# Altium PCB DE-110817.PcbDoc (part 1 of 2)
Units mil, origin at the board's own origin, x right, y up, seen from the top; angles counter-clockwise.
Board outline 3742.01 x 2935 mil, 2 copper layers (Top Layer, Bottom Layer); 204 components, 127 nets, 615 pads, 148 vias.
Unrouted connection lines stored in the file: 4.
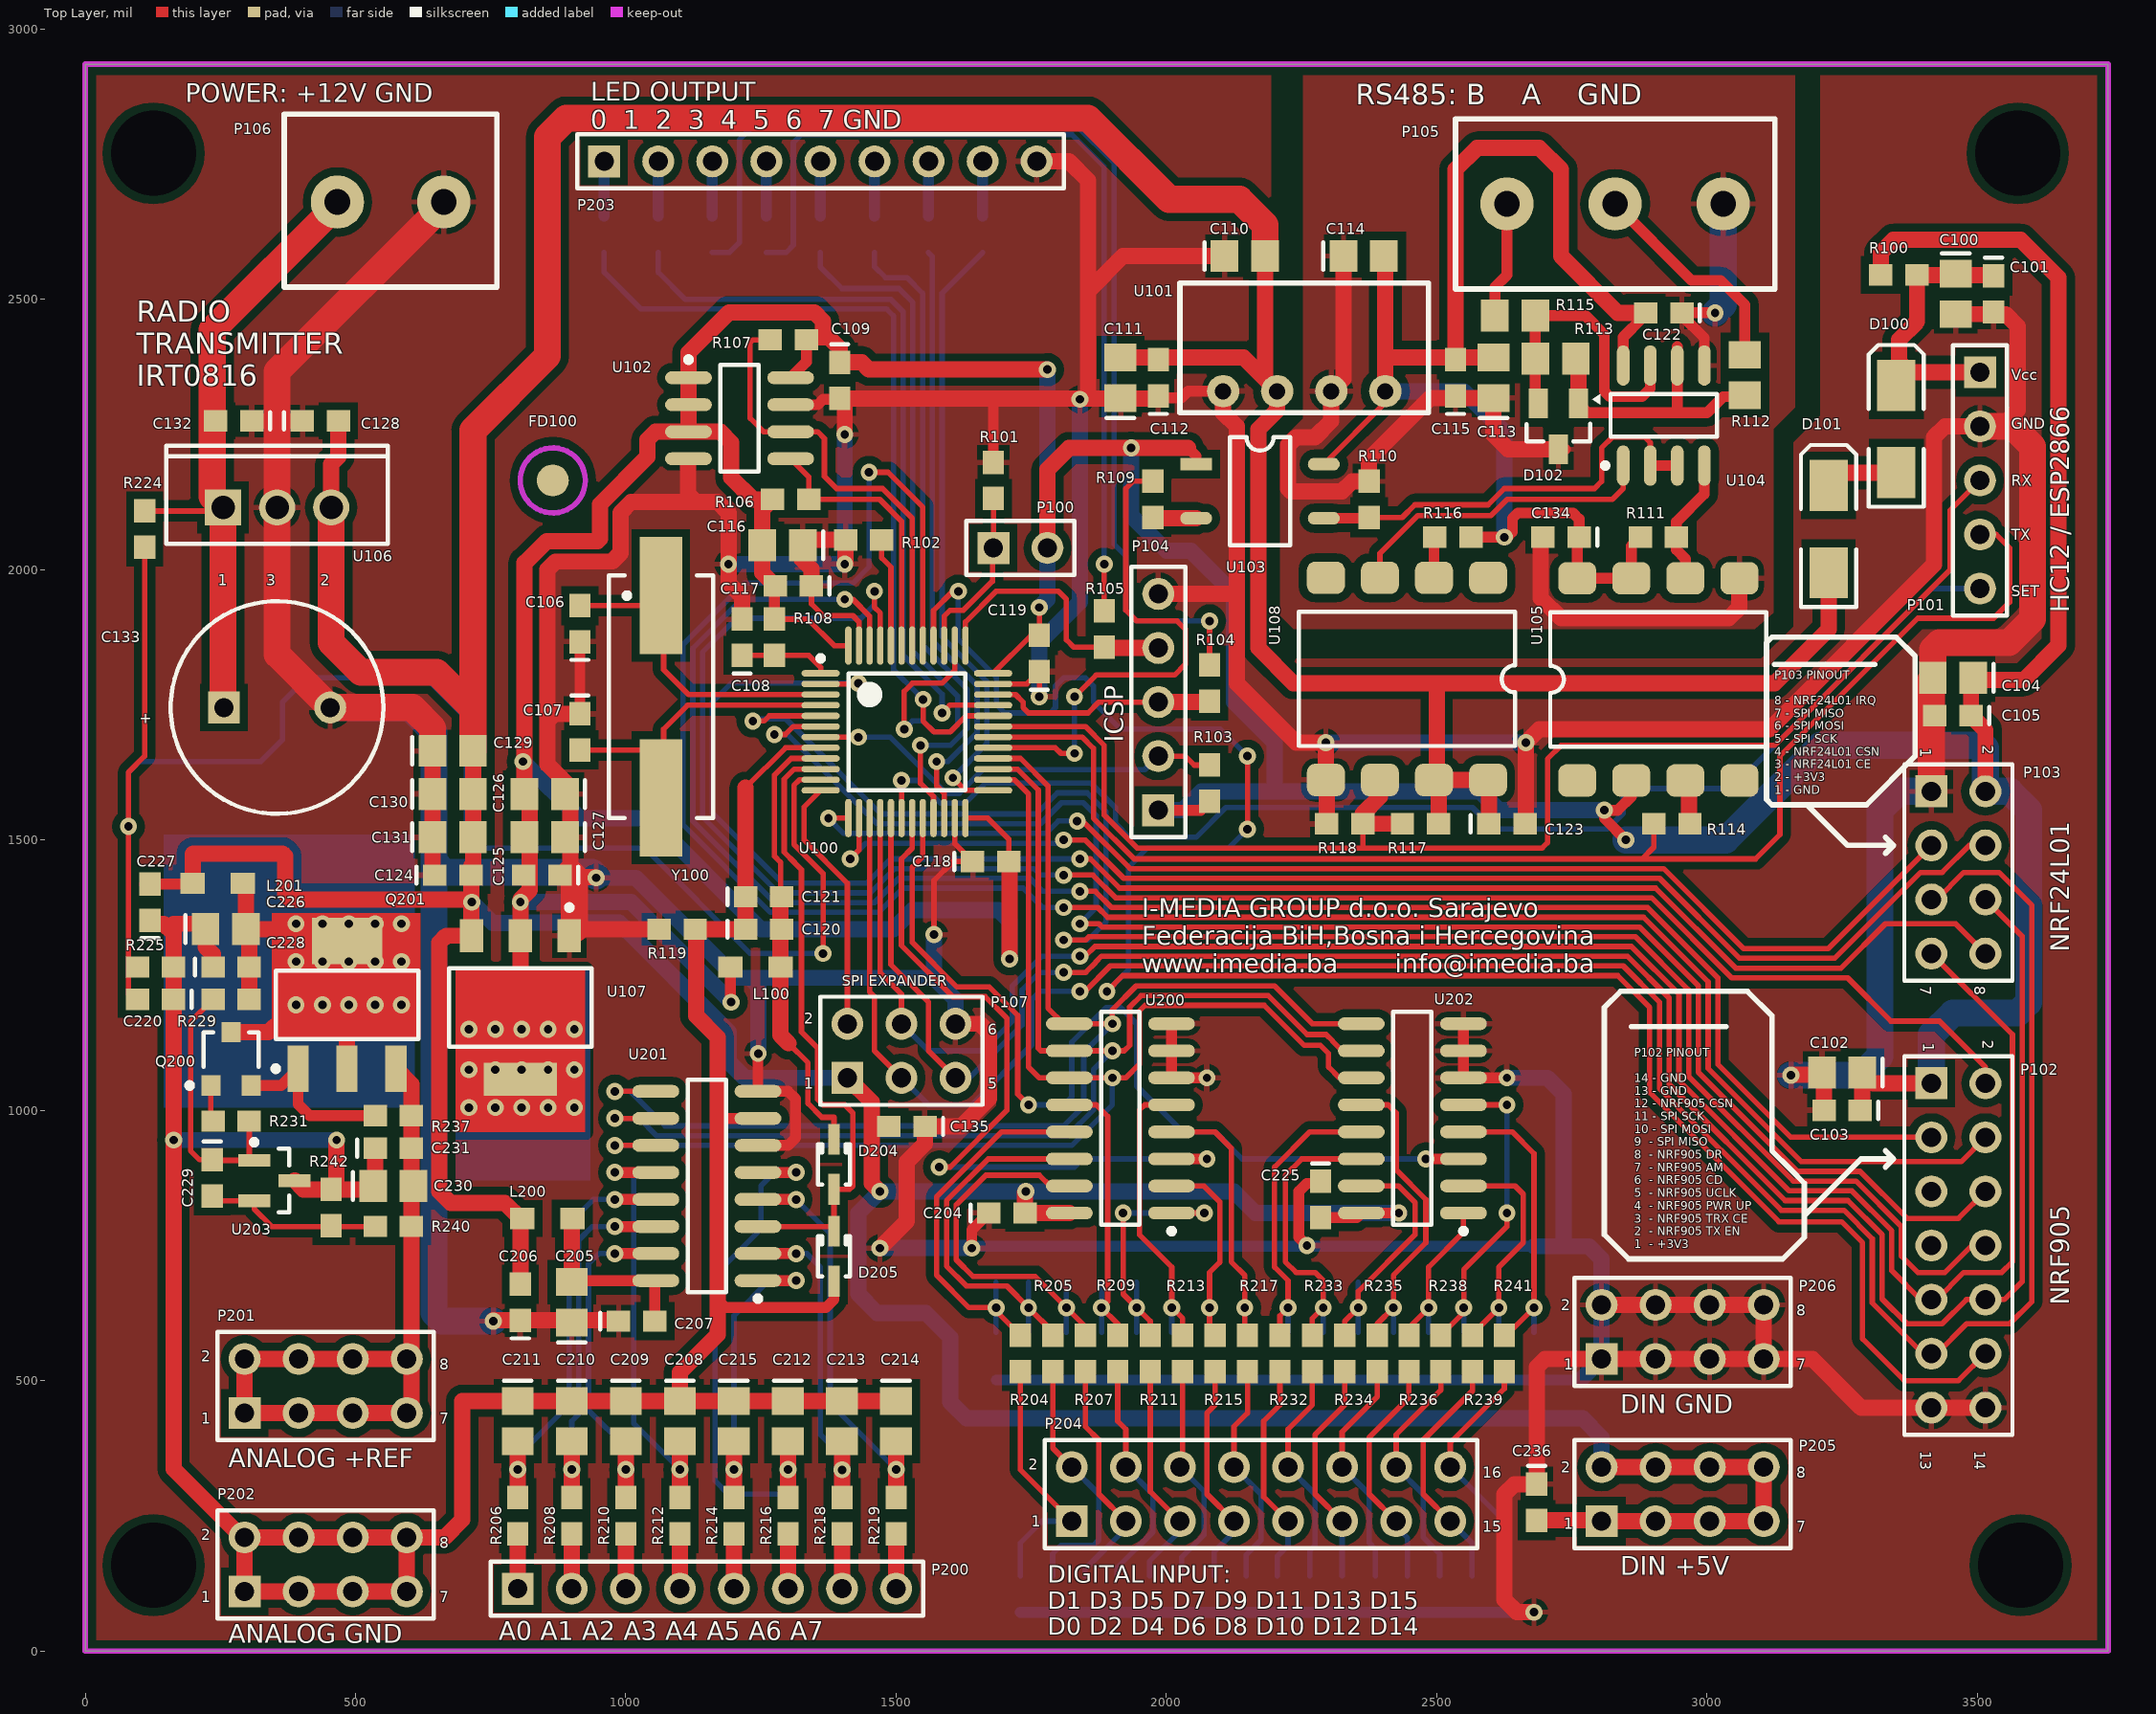
[diagram p0: Top Layer view]
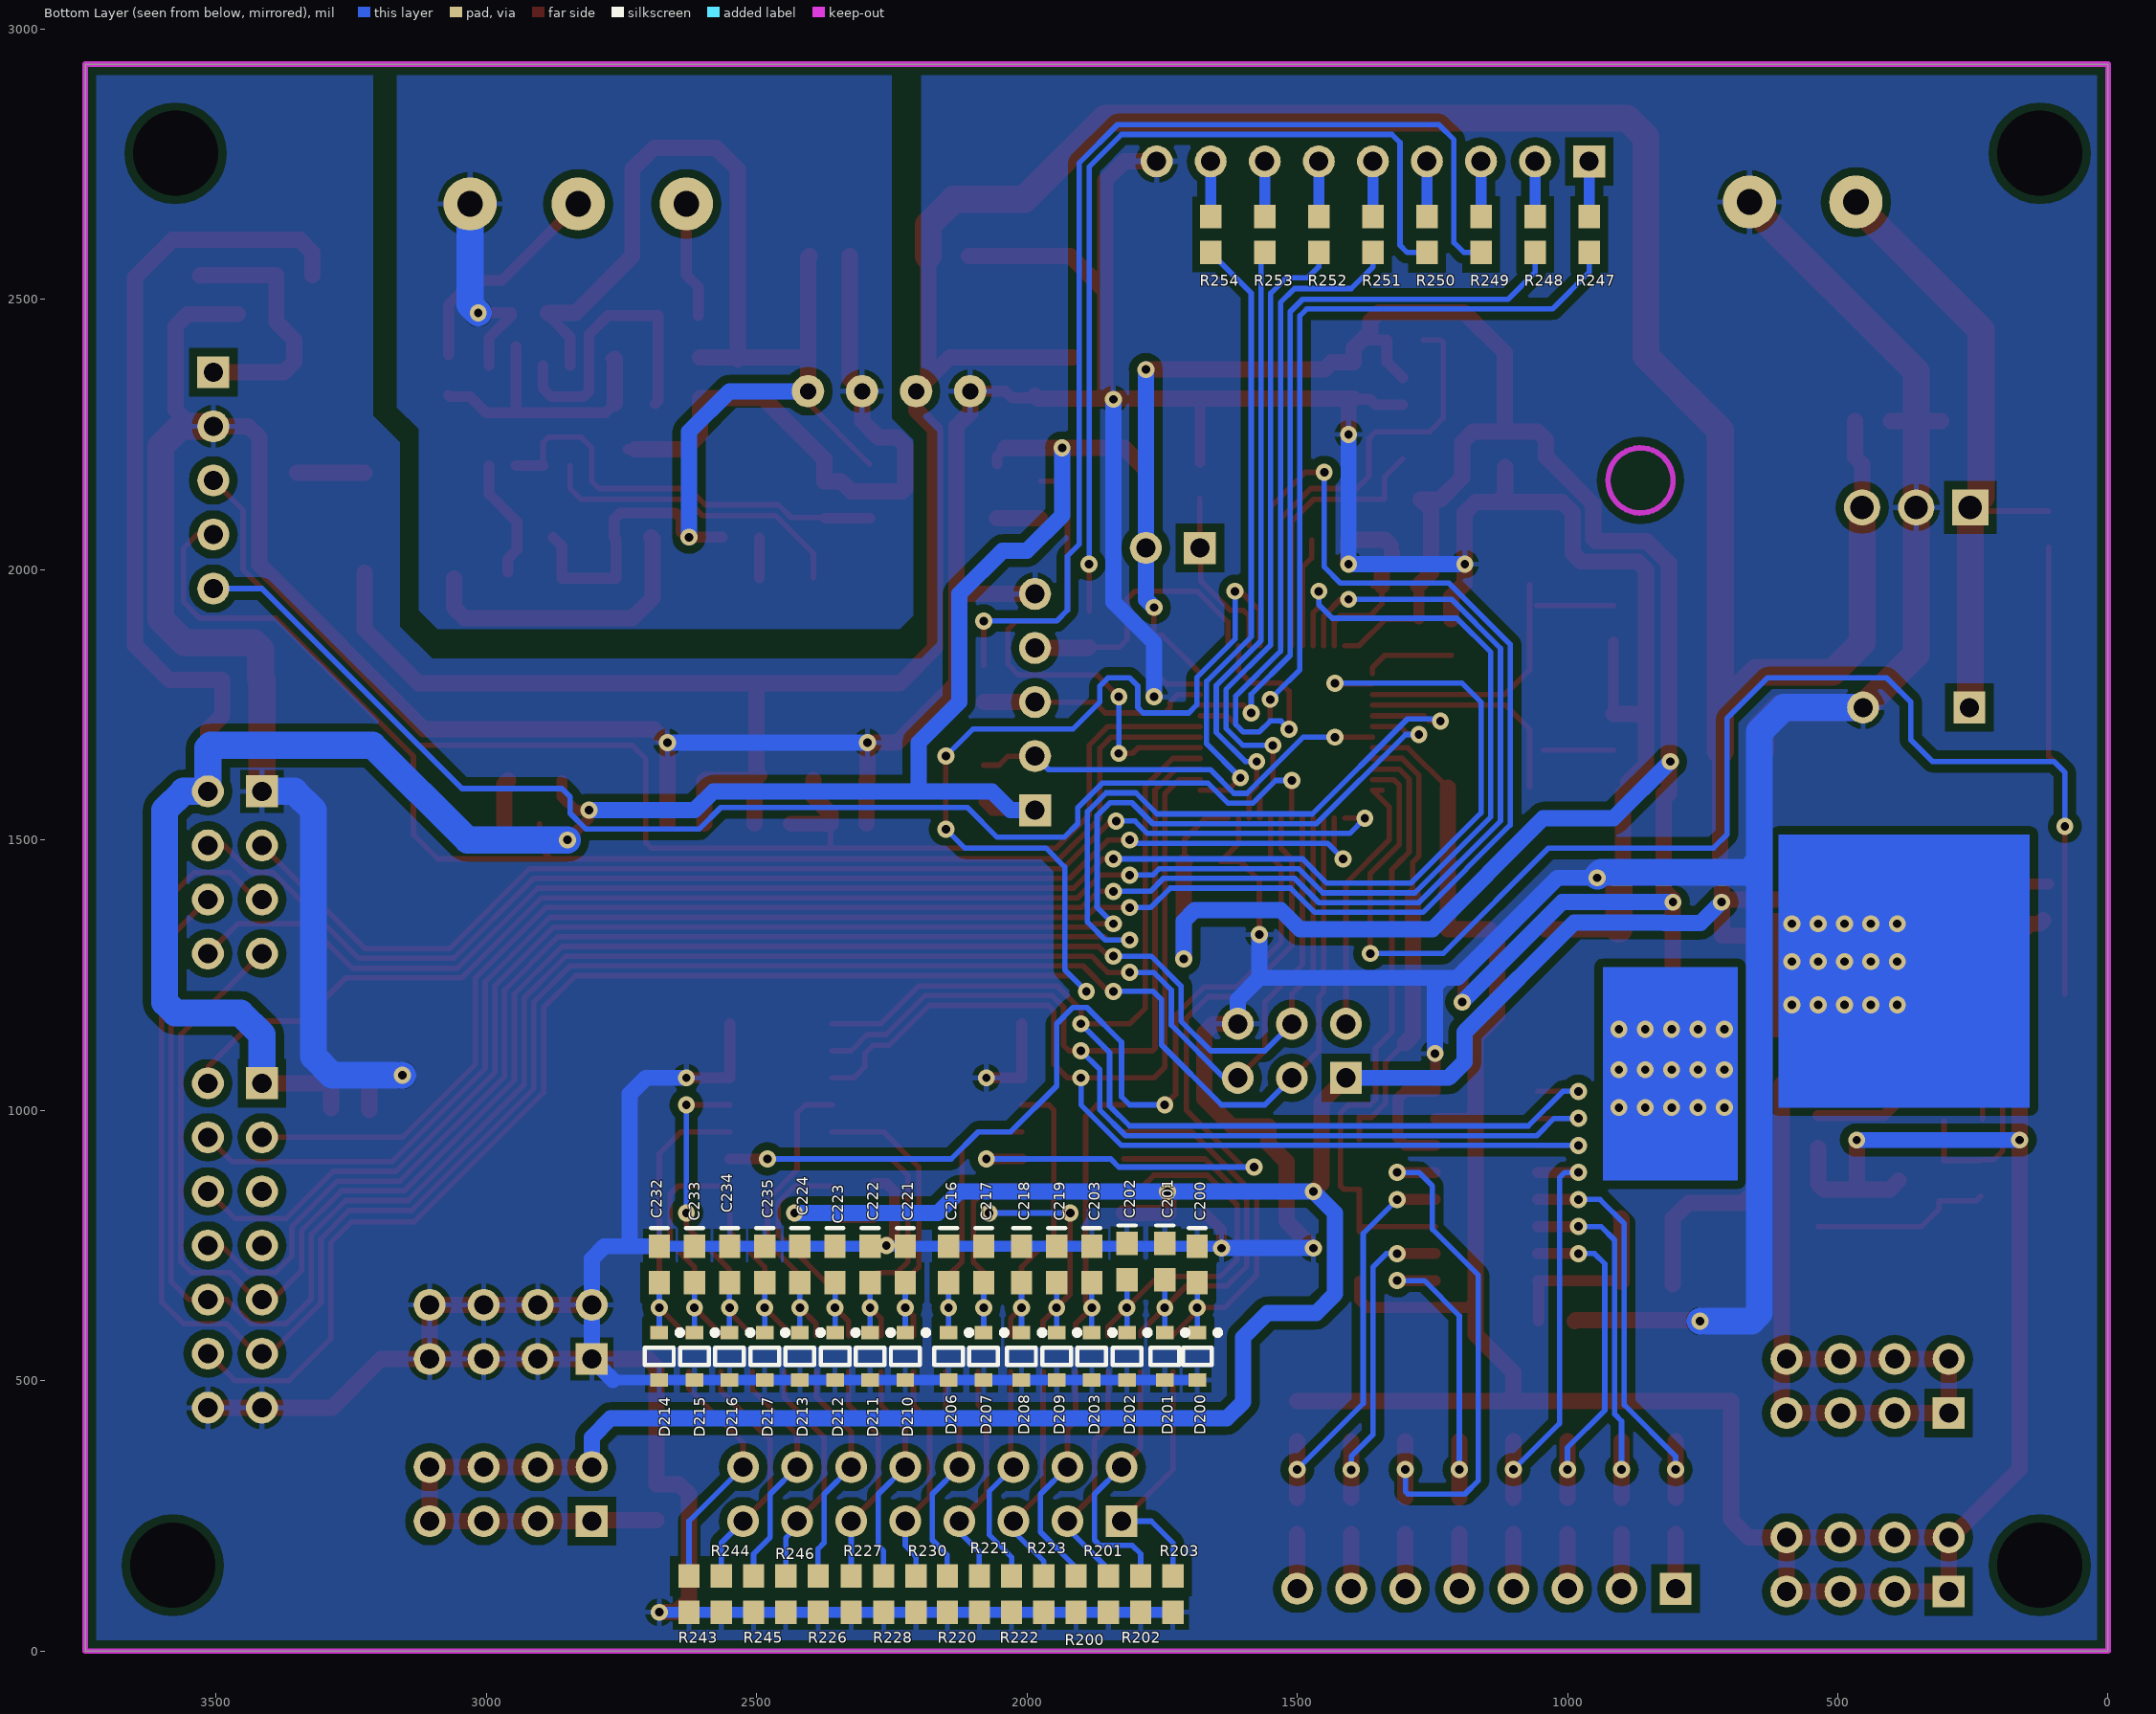
[diagram p1: Bottom Layer view, seen from below]

## Layer stack, top to bottom
Top Solder: solder mask 0.4, Solder Resist, Dk 3.5
Top Layer: signal copper 1.4
Dielectric 1: dielectric 12.6, FR-4, Dk 4.8
Bottom Layer: signal copper 1.4
Bottom Solder: solder mask 0.4, Solder Resist, Dk 3.5

## Board outline
0,0 0,2935 3742.01,2935 3742.01,0

## Design rules (kind name [scope] priority, off if disabled: settings)
Clearance [All] p1: gap=8 except(5: Arc-SMDPad Track-SMDPad SMDPad-SMDPad; 15: Arc-Poly Track-Poly SMDPad-Poly THPad-Poly Via-Poly Fill-Poly Poly-Poly)
PolygonConnect [All] p1: connectstyle=Relief reliefconductorwidth=10 reliefentries=4 polygonreliefangle="90 Angle" airgapwidth=10
RoutingVias [All] p1: holewidth=28 width=50 viastyle="Through Hole" minholewidth=28 minwidth=50 maxholewidth=28 maxwidth=50
SolderMaskExpansion [All] p1: expansion=4
Width [All] p1: maxlimit=500 minlimit=10 preferedwidth=30
30 further rules are at their usual default settings.

## Classes and differential pairs
component class DE-110817_02: C200 C201 C202 C203 C204 C205 C206 C207 C208 C209 C210 C211 C212 C213 C214 C215 C216 C217 C218 C219 C220 C221 C222 C223 C224 C225 C226 C227 C228 C229 C230 C231 C232 C233 C234 C235 C236 D200 D201 D202 D203 D204 D205 D206 D207 D208 D209 D210 D211 D212 D213 D214 D215 D216 D217 L200 L201 P13 P200 P201 P202 P203 P204 P205 P206 Q200 Q201 R74 R200 R201 R202 R203 R204 R205 R206 R207 R208 R209 R210 R211 R212 R213 R214 R215 R216 R217 R218 R219 R220 R221 R222 R223 R224 R225 R226 R227 R228 R229 R230 R231 R232 R233 R234 R235 R236 R237 R238 R239 R240 R241 R242 R243 R244 R245 R246 R247 R248 R249 R250 R251 R252 R253 R254 U200 U201 U202 U203
component class DE-110817_01: C100 C101 C102 C103 C104 C105 C106 C107 C108 C109 C110 C111 C112 C113 C114 C115 C116 C117 C118 C119 C120 C121 C122 C123 C124 C125 C126 C127 C128 C129 C130 C131 C132 C133 C134 C135 D100 D101 D102 FD100 L100 P100 P101 P102 P103 P104 P105 P106 P107 R100 R101 R102 R103 R104 R105 R106 R107 R108 R109 R110 R111 R112 R113 R114 R115 R116 R117 R118 R119 U100 U101 U102 U103 U104 U105 U106 U107 U108 Y100

## Components (designator, comment, footprint, x,y, rotation, side; value= is the part's Value field where it differs from the comment)
C100 "10uF" 0805 3460,2510 r270 top
C101 "100nF" 0603 3530,2510 r270 top
C102 "10uF" 0805 3250,1070 r180 top
C103 "100nF" 0603 3250,1000 r180 top
C104 "10uF" 0805 3455,1800 r180 top
C105 "100nF" 0603 3455,1730 r180 top
C106 "22pF" 0603 915,1900 r90 top
C107 "22pF" 0603 915,1700 r270 top
C108 "100nF" 0603 1215,1875 r90 top
C109 "100nF" 0603 1395.51,2350 r270 top
C110 "10uF" 0805 2145,2580 r0 top
C111 "10uF" 0805 1915,2355 r90 top
C112 "100nF" 0603 1985,2355 r90 top
C113 "10uF" 0805 2605,2355 r90 top
C114 "10uF" 0805 2365,2580 r0 top
C115 "100nF" 0603 2535,2355 r90 top
C116 "10uF" 0805 1290,2045 r180 top
C117 "100nF" 0603 1310,1970 r180 top
C118 "100nF" 0603 1675,1460 r0 top
C119 "100nF" 0603 1765,1845 r90 top
C120 "1uF" 0603 1255,1335 r0 top
C121 "100nF" 0603 1255,1395 r0 top
C122 "100nF" 0603 2920,2475 r180 top
C123 "100nF" 0603 2630,1530 r0 top
C124 "100nF" 0603 680,1435 r0 top
C125 "100nF" 0603 845,1435 r180 top
C126 "10uF" 0805 850,1585 r180 top
C127 "10uF" 0805 850,1505 r180 top
C128 "100nF" 0603 435,2275 r0 top
C129 "10uF" 0805 680,1665 r0 top
C130 "10uF" 0805 680,1585 r0 top
C131 "10uF" 0805 680,1505 r0 top
C132 "100nF" 0603 275,2275 r180 top
C133 "1000uF" CAPPR5-10x16 355,1745 r0 top
C134 "100nF" 0603 2730,2060 r180 top
C135 "100nF" 0603 1520,970 r180 top
C200 "100nF" 0603 1685,715 r270 bottom
C201 "100nF" 0603 1745,720 r270 bottom
C202 "100nF" 0603 1815,720 r270 bottom
C203 "100nF" 0603 1880,715 r270 bottom
C204 "100nF" 0603 1705,810 r0 top
C205 "10uF" 0805 900,645 r90 top
C206 "100nF" 0603 805,645 r90 top
C207 "100nF" 0603 1020,610 r0 top
C208 "10uF" 0805 1100,425 r270 top
C209 "10uF" 0805 1000,425 r270 top
C210 "10uF" 0805 900,425 r270 top
C211 "10uF" 0805 800,425 r270 top
C212 "10uF" 0805 1300,425 r270 top
C213 "10uF" 0805 1400,425 r270 top
C214 "10uF" 0805 1500,425 r270 top
C215 "10uF" 0805 1200,425 r270 top
C216 "100nF" 0603 2145,715 r270 bottom
C217 "100nF" 0603 2080,715 r270 bottom
C218 "100nF" 0603 2010,715 r270 bottom
C219 "100nF" 0603 1945,715 r270 bottom
C220 "100nF" 0603 130,1205 r180 top
C221 "100nF" 0603 2225,715 r270 bottom
C222 "100nF" 0603 2290,715 r270 bottom
C223 "100nF" 0603 2355,715 r270 bottom
C224 "100nF" 0603 2420,715 r270 bottom
C225 "100nF" 0603 2285,835 r270 top
C226 "10uF" 0805 260,1335 r0 top
C227 "100nF" 0603 120,1385 r90 top
C228 "100nF" 0603 270,1265 r0 top
C229 "10nF" 0603 235,875 r270 top
C230 "10uF" 0805 570,860 r0 top
C231 "100nF" 0603 570,930 r0 top
C232 "100nF" 0603 2680,715 r270 bottom
C233 "100nF" 0603 2615,715 r270 bottom
C234 "100nF" 0603 2550,715 r270 bottom
C235 "100nF" 0603 2485,715 r270 bottom
C236 "100nF" 0603 2685,275 r270 top
D100 "1N4001" SMA 3350,2260 r90 top
D101 "1N4001" SMA 3225,2075 r90 top
D102 "SM712" SOT23_3L 2725,2265 r270 top
D200 "3V3" ONSC-SOD-323-2-477-02_V 1685,545 r270 bottom
D201 "3V3" ONSC-SOD-323-2-477-02_V 1745,545 r270 bottom
D202 "3V3" ONSC-SOD-323-2-477-02_V 1815,545 r270 bottom
D203 "3V3" ONSC-SOD-323-2-477-02_V 1880,545 r270 bottom
D204 "1N4148" SOD323 1385,900 r90 top
D205 "1N4148" SOD323 1385,730 r90 top
D206 "3V3" ONSC-SOD-323-2-477-02_V 2145,545 r270 bottom
D207 "3V3" ONSC-SOD-323-2-477-02_V 2080,545 r270 bottom
D208 "3V3" ONSC-SOD-323-2-477-02_V 2010,545 r270 bottom
D209 "3V3" ONSC-SOD-323-2-477-02_V 1945,545 r270 bottom
D210 "3V3" ONSC-SOD-323-2-477-02_V 2225,545 r270 bottom
D211 "3V3" ONSC-SOD-323-2-477-02_V 2290,545 r270 bottom
D212 "3V3" ONSC-SOD-323-2-477-02_V 2355,545 r270 bottom
D213 "3V3" ONSC-SOD-323-2-477-02_V 2420,545 r270 bottom
D214 "3V3" ONSC-SOD-323-2-477-02_V 2680,545 r270 bottom
D215 "3V3" ONSC-SOD-323-2-477-02_V 2615,545 r270 bottom
D216 "3V3" ONSC-SOD-323-2-477-02_V 2550,545 r270 bottom
D217 "3V3" ONSC-SOD-323-2-477-02_V 2485,545 r270 bottom
FD100 "Fiducial" Fiducial 865,2165 r0 top
L100 "120R" SMD-0805 1240,1265 r0 top
L200 "120R" SMD-0805 855,800 r0 top
L201 "120R" SMD-0805 245,1420 r0 top
P100 "CONFIG" HDR1X2 1680,2040 r0 top
P101 "HC12_RADIO" HDR1X5 3505,2365 r270 top
P102 "nRF905" HDR2X7 3415,1050 r270 top
P103 "NRF24L01" HDR2X4 3415,1590 r270 top
P104 "ULINK_ICSP" HDR1X5 1985,1555 r90 top
P105 "TERMINAL BLOK 3" "TERMINAL BLOK 3" 2830,2676.46 r270 top
P106 "TERMINAL BLOK 2" "TERMINAL BLOK 2" 565,2680 r90 top
P107 "SPI_EXPANDER" HDR2X3 1410,1060 r0 top
P200 "ANALOG_INPUT" HDR1X8 800,115 r0 top
P201 "ANIN_VREF" HDR2X4 295,440 r0 top
P202 "ANIN_VSS" HDR2X4 295,110 r0 top
P203 "LED" HDR1X9 960,2755 r0 top
P204 "DIGITAL_INPUT" HDR2X8 1825,240 r0 top
P205 "DIN_VDD" HDR2X4 2805,240 r0 top
P206 "DIN_VSS" HDR2X4 2805,540 r0 top
Q200 "MMBT2222" 318-08 270,1095 r0 top
Q201 "BCP56" SOT223_N 484.33,1195 r90 top
R100 "NF" ERA-0603 3355,2545 r180 top
R101 "100K" ERA-0603 1680,2165 r270 top
R102 "10K" ERA-0603 1440,2055 r180 top
R103 "10K" ERA-0603 2080,1605 r270 top
R104 "100R" ERA-0603 2080,1790 r90 top
R105 "100R" ERA-0603 1885,1890 r90 top
R106 "2K2" ERA-0603 1305,2130 r0 top
R107 "2K2" ERA-0603 1300.51,2425 r180 top
R108 "0R" ERA-0603 1275,1875 r90 top
R109 "330R" ERA-0603 1975,2130 r90 top
R110 "470R" ERA-0603 2375,2130 r90 top
R111 "470R" ERA-0603 2910,2060 r0 top
R112 "10R" ERA-0805 3070,2360 r90 top
R113 "120R" ERA-0805 2720,2390 r0 top
R114 "330R" ERA-0603 2935,1530 r0 top
R115 "10R" ERA-0805 2645,2470 r180 top
R116 "330R" ERA-0603 2530,2060 r0 top
R117 "510R" ERA-0603 2470,1530 r180 top
R118 "1K" ERA-0603 2330,1530 r0 top
R119 "0R" ERA-0603 1095,1335 r0 top
R200 "10K" ERA-0603 1909,105 r90 bottom
R201 "10K" ERA-0603 1849.33,105 r90 bottom
R202 "10K" ERA-0603 1789.67,105 r90 bottom
R203 "10K" ERA-0603 1730,105 r90 bottom
R204 "10K" ERA-0603 1730,550 r90 top
R205 "10K" ERA-0603 1790,550 r90 top
R206 "100R" ERA-0603 800,250 r270 top
R207 "10K" ERA-0603 1850,550 r90 top
R208 "100R" ERA-0603 900,250 r270 top
R209 "10K" ERA-0603 1910,550 r90 top
R210 "100R" ERA-0603 1000,250 r270 top
R211 "10K" ERA-0603 1970,550 r90 top
R212 "100R" ERA-0603 1100,250 r270 top
R213 "10K" ERA-0603 2030,550 r90 top
R214 "100R" ERA-0603 1200,250 r270 top
R215 "10K" ERA-0603 2090,550 r90 top
R216 "100R" ERA-0603 1300,250 r270 top
R217 "10K" ERA-0603 2150,550 r90 top
R218 "100R" ERA-0603 1400,250 r270 top
R219 "100R" ERA-0603 1500,250 r270 top
R220 "10K" ERA-0603 2147.33,105 r90 bottom
R221 "10K" ERA-0603 2088,105 r90 bottom
R222 "10K" ERA-0603 2028.33,105 r90 bottom
R223 "10K" ERA-0603 1968.67,105 r90 bottom
R224 "330K" ERA-0603 110,2075 r90 top
R225 "82K" ERA-0603 130,1265 r180 top
R226 "10K" ERA-0603 2386.33,105 r90 bottom
R227 "10K" ERA-0603 2325,105 r90 bottom
R228 "10K" ERA-0603 2265,105 r90 bottom
R229 "560R" ERA-0603 270,1205 r0 top
R230 "10K" ERA-0603 2205,105 r90 bottom
R231 "33R" ERA-0603 270,980 r0 top
R232 "10K" ERA-0603 2210,550 r90 top
R233 "10K" ERA-0603 2270,550 r90 top
R234 "10K" ERA-0603 2330,550 r90 top
R235 "10K" ERA-0603 2390,550 r90 top
R236 "10K" ERA-0603 2448.75,550 r90 top
R237 "4K7" ERA-0603 570,990 r0 top
R238 "10K" ERA-0603 2507.5,550 r90 top
R239 "10K" ERA-0603 2566.25,550 r90 top
R240 "1K8" ERA-0603 570,785 r0 top
R241 "10K" ERA-0603 2625,550 r90 top
R242 "5K6" ERA-0603 455,820 r90 top
R243 "10K" ERA-0603 2625,105 r90 bottom
R244 "10K" ERA-0603 2565.33,105 r90 bottom
R245 "10K" ERA-0603 2505.67,105 r90 bottom
R246 "10K" ERA-0603 2446,105 r90 bottom
R247 "330R" ERA-0603 960,2620 r270 bottom
R248 "330R" ERA-0603 1060,2620 r270 bottom
R249 "220R" ERA-0603 1160,2620 r270 bottom
R250 "220R" ERA-0603 1260,2620 r270 bottom
R251 "330R" ERA-0603 1360,2620 r270 bottom
R252 "330R" ERA-0603 1460,2620 r270 bottom
R253 "330R" ERA-0603 1560,2620 r270 bottom
R254 "330R" ERA-0603 1660,2620 r270 bottom
U100 "STM32F103C8T6" STM-LQFP48_N 1520,1700 r0 top
U101 "B0505S/D-1W" B0505S-1W 2105,2330 r0 top
U102 "AT24C1024" SOIC-SN8_N 1210.51,2280 r0 top
U103 "PS2501L" SOP4 2055,2195 r0 top
U104 "SN75176BD" D008_L 2920,2285 r90 top
U105 "6N137" SMD-8 2760,1610 r90 top
U106 "L7805CV" TO220ABN 355,2115 r0 top
U107 "REG1117-3.3" ZZ311 805,1190 r180 top
U108 "6N137" SMD-8 2595,1985 r270 top
U200 "HCF4051M013TR" M16A_N 1915,985 r180 top
U201 "HCF4051M013TR" M16A_N 1150,860 r180 top
U202 "HCF4051M013TR" M16A_N 2455,985 r180 top
U203 "TL431CL3T" SOT23-3_N 350,870 r0 top
Y100 "8MHz" HC49/4H_SMX 1065,1765 r270 top

## Footprints (in the part's own frame and the unit in brackets; to place one, negate y for a bottom-side part, rotate by r counter-clockwise, add the part's x,y. Pads: shape width x height; smd on the part's side, far side on the other; paste and mask are expansions set on the pad)
318-08 [mm] "SOT-23; 3 Leads; Body 3.0 x 2.6 mm, inc. leads (LxW max)"
  rect 0.9x0.95 smd: 1(-0.95,-1.25) 2(0.95,-1.25) 3(0,1.25)
  silkscreen extent -2.07,-1.37 1.3,1.25
0603 [mm] "Chip Capacitor; Body 1.6 x 0.8 mm (LxW typ)"
  rect 1.1x1 smd: 1(-0.85,0) 2(0.85,0)
  silkscreen extent -1.7,-0.4 -1.7,0.4
0805 [mm] "Chip Capacitor; Body 2.0 x 1.2 mm (LxW typ)"
  rect 1.3x1.5 smd: 1(-0.95,0) 2(0.95,0)
  silkscreen extent -1.9,-0.65 -1.9,0.65
B0505S-1W [mil] "Isolated DC DC converter"
  round 60 hole 30: 1(0,0) 2(100,0) 3(200,0) 4(300,0)
  silkscreen extent -80,-40 380,200, body extent -80,-40 380,200, height 394
CAPPR5-10x16 [mm] "Capacitor, Electrolytic, Radial; Body 10 x 16 mm (Dia.xH typ); Pin Spacing 5 mm (typ)"
  rect 1.5x1.5 hole 0.9: 1(-2.5,0)
  round 1.5 hole 0.9: 2(2.5,0)
  silkscreen extent -5,-5 5,5, body extent -5,-5 5,5, height 18
D008_L [mm] "SOIC, 8-Leads, Body 4.9x3.9mm, Pitch 1.27mm, IPC High Density"
  oval 1.9x0.6 smd: 1(-2.35,1.905) 2(-2.35,0.635) 3(-2.35,-0.635) 4(-2.35,-1.905) 5(2.35,-1.905) 6(2.35,-0.635) 7(2.35,0.635) 8(2.35,1.905)
  silkscreen extent -2.47,-2.5 1,2.88, body extent -2,-2.5 2,2.5, height 1.75
ERA-0603 [mm] "Chip Resistor; Body 1.6 x 0.8 mm (LxW typ)"
  rect 1.1x1 smd: 1(-0.85,0) 2(0.85,0)
ERA-0805 [mm] "Chip Resistor; Body 2 x 1.3 mm (LxW typ)"
  rect 1.3x1.5 smd: 1(-0.95,0) 2(0.95,0)
Fiducial [mm] "Pick and place machine mark"
  round 1.5 smd paste+0 mask+0.8: FD(0,0)
  Keep-Out Layer circle w0.254: c0,0 r1.529
HC49/4H_SMX [mm] "Surface Mount Quartz Crystal; Body 13.4 (inc. leads) x 4.9 mm (LxW max)"
  rect 5.5x2 smd: 1(-4.75,0) 2(4.75,0)
  silkscreen extent -5.7,-2.45 5.7,2.45, body extent -7.6,-2.55 7.6,2.55, height 4.3
HDR1X2 [mm] "Connector; Header; 2 Position"
  rect 1.5x1.5 hole 0.9: 1(0,0)
  round 1.5 hole 0.9: 2(2.54,0)
  silkscreen extent -1.27,-1.27 3.81,1.27
HDR1X5 [mm] "Connector; Header; 5 Position"
  rect 1.5x1.5 hole 0.9: 1(0,0)
  round 1.5 hole 0.9: 2(2.54,0) 3(5.08,0) 4(7.62,0) 5(10.16,0)
  silkscreen extent -1.27,-1.27 11.43,1.27
HDR1X8 [mm] "Connector; Header; 8 Position"
  rect 1.5x1.5 hole 0.9: 1(0,0)
  round 1.5 hole 0.9: 2(2.54,0) 3(5.08,0) 4(7.62,0) 5(10.16,0) 6(12.7,0) 7(15.24,0) 8(17.78,0)
  silkscreen extent -1.27,-1.27 19.05,1.27
HDR1X9 [mm] "Connector; Header; 9 Position"
  rect 1.5x1.5 hole 0.9: 1(0,0)
  round 1.5 hole 0.9: 2(2.54,0) 3(5.08,0) 4(7.62,0) 5(10.16,0) 6(12.7,0) 7(15.24,0) 8(17.78,0) 9(20.32,0)
  silkscreen extent -1.27,-1.27 21.59,1.27
HDR2X3 [mm] "Connector; Header; 3x2 Position"
  rect 1.5x1.5 hole 0.9: 1(0,0)
  round 1.5 hole 0.9: 2(0,2.54) 3(2.54,0) 4(2.54,2.54) 5(5.08,0) 6(5.08,2.54)
  silkscreen extent -1.27,-1.27 6.35,3.81
HDR2X4 [mm] "Connector; Header; 4x2 Position"
  rect 1.5x1.5 hole 0.9: 1(0,0)
  round 1.5 hole 0.9: 2(0,2.54) 3(2.54,0) 4(2.54,2.54) 5(5.08,0) 6(5.08,2.54) 7(7.62,0) 8(7.62,2.54)
  silkscreen extent -1.27,-1.27 8.89,3.81
HDR2X7 [mm] "Connector; Header; 7x2 Position"
  rect 1.5x1.5 hole 0.9: 1(0,0)
  round 1.5 hole 0.9: 2(0,2.54) 3(2.54,0) 4(2.54,2.54) 5(5.08,0) 6(5.08,2.54) 7(7.62,0) 8(7.62,2.54) 9(10.16,0) 10(10.16,2.54) 11(12.7,0) 12(12.7,2.54) 13(15.24,0) 14(15.24,2.54)
  silkscreen extent -1.27,-1.27 16.51,3.81
HDR2X8 [mm] "Connector; Header; 8x2 Position"
  rect 1.5x1.5 hole 0.9: 1(0,0)
  round 1.5 hole 0.9: 2(0,2.54) 3(2.54,0) 4(2.54,2.54) 5(5.08,0) 6(5.08,2.54) 7(7.62,0) 8(7.62,2.54) 9(10.16,0) 10(10.16,2.54) 11(12.7,0) 12(12.7,2.54) 13(15.24,0) 14(15.24,2.54) 15(17.78,0) 16(17.78,2.54)
  silkscreen extent -1.27,-1.27 19.05,3.81
M16A_N [mm] "SOIC, 16-Leads, Body 9.9x3.9mm, Pitch 1.27mm, IPC Medium Density"
  oval 2.2x0.6 smd: 1(-2.4,4.445) 2(-2.4,3.175) 3(-2.4,1.905) 4(-2.4,0.635) 5(-2.4,-0.635) 6(-2.4,-1.905) 7(-2.4,-3.175) 8(-2.4,-4.445) 9(2.4,-4.445) 10(2.4,-3.175) 11(2.4,-1.905) 12(2.4,-0.635) 13(2.4,0.635) 14(2.4,1.905) 15(2.4,3.175) 16(2.4,4.445)
  silkscreen extent -2.53,-5 0.9,5.42, body extent -2,-5 2,5, height 1.75
ONSC-SOD-323-2-477-02_V [mm] "SOD, 2-Leads, Body 1.7x1.25mm"
  rect 0.63x0.83 smd: 1(-1.115,0) 2(1.115,0)
  silkscreen extent -1.24,-0.67 0.4,1.09, body extent -0.85,-0.63 0.85,0.63, height 1.06
SMA [mm] "DO-214-AC/SMA; 2 C-Bend Leads; Body 5 x 2.7 mm, inc. leads (LxW)"
  rect 2.4x1.8 smd: 1(-2.05,0) 2(2.05,0)
  silkscreen extent -3.65,-1.3 3.95,1.3
SMD-8 [mm]
  rrect50% 1.52x1.78 smd: 1(0,0) 2(0,-2.54) 3(0,-5.08) 4(0,-7.62) 5(9.5,-7.62) 6(9.5,-5.08) 7(9.5,-2.54) 8(9.5,0)
  silkscreen extent 1.59,-8.89 7.91,1.27, body extent 1.27,-8.89 8.38,1.27, height 3.55
SMD-0805 [mm] "Chip Inductor, 2-Leads, Body 2.0x1.2x1.1 mm"
  rect 1.15x1 smd: 1(-1.175,0) 2(1.175,0)
  body extent -1,-0.6 1,0.6, height 1.1
SOD323 [mm] "SOD-323/SC-76; 2 Leads; Body 1.7 x 1.3 mm, (LxW)"
  rect 1.45x0.55 smd: 1(1.175,0) 2(-1.175,0)
  silkscreen extent -0.95,-0.75 0.95,0.75
SOIC-SN8_N [mm] "SOIC, 8-Leads, Body 4.9x3.8mm, Pitch 1.27mm, IPC Medium Density"
  oval 2.2x0.6 smd: 1(-2.4,1.905) 2(-2.4,0.635) 3(-2.4,-0.635) 4(-2.4,-1.905) 5(2.4,-1.905) 6(2.4,-0.635) 7(2.4,0.635) 8(2.4,1.905)
  silkscreen extent -2.52,-2.5 0.9,2.88, body extent -2,-2.5 2,2.5, height 1.75
SOP4 [mm]
  rect 1.5x0.6 smd: 1(0,0)
  oval 1.5x0.6 smd: 2(0,-2.54) 3(6,-2.54) 4(6,0)
  silkscreen extent 1.58,-3.81 4.42,1.27
SOT23-3_N [mm] "SOT23, 3-Leads, Body 2.9x1.3mm, Pitch 0.95mm, Lead Span 2.4mm, IPC Medium Density"
  rect 1.5x0.6 smd: 1(-0.95,0.95) 2(-0.95,-0.95) 3(0.95,0)
  silkscreen extent -1.07,-1.5 0.7,1.92, body extent -0.7,-1.52 0.7,1.52, height 1.12
SOT23_3L [mm] "SOT23, 3-Leads, Body 2.9x2.4mm, Pitch 0.95mm"
  rect 1.4x0.9 smd: 1(-1.075,0.95) 2(-1.075,-0.95) 3(1.075,0)
  silkscreen extent -1.52,-1.5 0.7,1.97, body extent -1.2,-1.45 1.2,1.45, height 1.1
SOT223_N [mm] "SOT223, 4-Leads, Body 6.5x3.5mm, Pitch 2.3mm, Lead Span 7mm, IPC Medium Density"
  rect 2.2x1 smd: 1(-3,2.3) 2(-3,0) 3(-3,-2.3)
  rect 2.2x3.3 smd: 4(3,0)
  silkscreen extent -3.12,-3.35 1.6,3.47, body extent -1.85,-3.35 1.85,3.35, height 1.8
STM-LQFP48_N [mm] "QFP, 48-Leads, Body 7x7mm, Pitch 0.5mm, IPC Medium Density"
  oval 1.8x0.3 smd: 1(-4.05,2.75) 2(-4.05,2.25) 3(-4.05,1.75) 4(-4.05,1.25) 5(-4.05,0.75) 6(-4.05,0.25) 7(-4.05,-0.25) 8(-4.05,-0.75) 9(-4.05,-1.25) 10(-4.05,-1.75) 11(-4.05,-2.25) 12(-4.05,-2.75) 25(4.05,-2.75) 26(4.05,-2.25) 27(4.05,-1.75) 28(4.05,-1.25) 29(4.05,-0.75) 30(4.05,-0.25) 31(4.05,0.25) 32(4.05,0.75) 33(4.05,1.25) 34(4.05,1.75) 35(4.05,2.25) 36(4.05,2.75)
  oval 0.3x1.8 smd: 13(-2.75,-4.05) 14(-2.25,-4.05) 15(-1.75,-4.05) 16(-1.25,-4.05) 17(-0.75,-4.05) 18(-0.25,-4.05) 19(0.25,-4.05) 20(0.75,-4.05) 21(1.25,-4.05) 22(1.75,-4.05) 23(2.25,-4.05) 24(2.75,-4.05) 37(2.75,4.05) 38(2.25,4.05) 39(1.75,4.05) 40(1.25,4.05) 41(0.75,4.05) 42(0.25,4.05) 43(-0.25,4.05) 44(-0.75,4.05) 45(-1.25,4.05) 46(-1.75,4.05) 47(-2.25,4.05) 48(-2.75,4.05)
  silkscreen extent -4.17,-2.75 2.75,3.57, body extent -3.5,-3.5 3.5,3.5, height 1.6
"TERMINAL BLOK 2" [mm] "2 pinski terminal blok konektor"
  round 2.5 hole 1.2: 1(0,-2.5) 2(0,2.5)
  silkscreen extent -4,-5 4.13,5
"TERMINAL BLOK 3" [mm] "3 pinski terminal blok konektor"
  round 2.5 hole 1.2: 1(0,5.08) 2(0,0) 3(0,-5.08)
  silkscreen extent -4,-7.5 4,7.5
TO220ABN [mm] "TO, Thru-Hole, Vertical, Heatsink Mounted; 3 In-Line Leads; Pitch 2.54 mm; Pin sequence 1, 3, 2"
  rect 1.7x1.7 hole 1.1: 1(-2.54,0)
  round 1.7 hole 1.1: 2(2.54,0) 3(0,0)
  silkscreen extent -5.2,-1.7 5.2,2.9, body extent -5.3,-1.8 5.3,3, height 19.7
ZZ311 [mm] "SOT-223/SC-73; 4 Leads; Body 6.7 x 7.3 mm, inc. leads (LxW max)"
  rect 1.1x1.55 smd: 1(-2.3,-3.375) 2(0,-3.375) 3(2.3,-3.375)
  rect 3.45x1.55 smd: 4(0,3.375)
  silkscreen extent -3.35,-4.82 3.35,1.85

## Part data
C100 C102 C104 C110 C111 C113 C114 C116 C126 C127 C129 C130 C131 C205 C208 C209 C210 C211 C212 C213 C214 C215 C226 C230: library part C0805, "Ceramic Chip Capacitor - Standard"
C101 C103 C105 C106 C107 C108 C109 C112 C115 C117 C118 C119 C120 C121 C122 C123 C124 C125 C128 C132 C134 C135 C200 C201 C202 C203 C204 C206 C207 C216 C217 C218 C219 C220 C221 C222 C223 C224 C225 C227 C228 C229 C231 C232 C233 C234 C235 C236: library part C0603, "Ceramic Chip Capacitor - Standard"
C133: library part EKA00DD410D00, "Aluminum Electrolytic Capacitor, Radial Style with Long Leads: 1000uF, 16V"
D100 D101: library part 10MQ060N, "Schottky Rectifier"
D102: library part 824022, "TVS Diode WE-TVS-Standard, VRWM=5.0V"
D200 D201 D202 D203 D206 D207 D208 D209 D210 D211 D212 D213 D214 D215 D216 D217: library part MM3Z33VT1G, "Zener Voltage Regulator, 300 mW, 2-Pin SOD-323, Pb-Free, Tape and Reel"
D204 D205: library part BAS321, "General-purpose Diode"
FD100: library part Fiduchial, "Fiduchial mark"
L100 L200 L201: library part 74279202, "SMD EMI Suppression Ferrite Bead WE-CBF, Z = 120 Ohm"
P100: library part "Header 2", "Header, 2-Pin"
P101 P104: library part "Header 5", "Header, 5-Pin"
P102: library part "Header 7X2", "Header, 7-Pin, Dual row"
P103 P201 P202 P205 P206: library part "Header 4X2", "Header, 4-Pin, Dual row"
P105: "3 pinski terminal blok konektor"
P106: "2 pinski terminal blok"
P107: library part "Header 3X2", "Header, 3-Pin, Dual row"
P200: library part "Header 8", "Header, 8-Pin"
P203: library part "Header 9", "Header, 9-Pin"
P204: library part "Header 8X2", "Header, 8-Pin, Dual row"
Q200: library part MMBT2222ALT1, "General Purpose Transistor NPN Silicon"
Q201: "NPN Medium Power Transistor"
R100 R109 R110 R111 R116 R117 R118 R119 R200 R201 R202 R203 R204 R205 R206 R207 R208 R209 R210 R211 R212 R213 R214 R215 R216 R217 R218 R219 R220 R221 R222 R223 R224 R225 R226 R227 R228 R229 R230 R231 R232 R233 R234 R235 R236 R237 R238 R239 R240 R241 R242 R243 R244 R245 R246 R247 R248 R249 R250 R251 R252 R253 R254: library part ERAV, "Metal Film Thermosensitive Chip Resistor, 0.56 Ohm to 10k Ohm Range, 5% Tolerance, 0603 Size, 0.063 W"
R101 R102 R103 R104 R105 R106 R107 R108 R114: library part ERA3Y, "Rectangular Thick Film Chip Resistor, 10 Ohm to 330k Ohm Range, 0.1% and 0.5% Tolerance, 0603 Size, 0.063 W"
R112 R113 R115: library part ERA6Y, "Rectangular Thick Film Chip Resistor, 10 Ohm to 1M Ohm Range, 0.1% and 0.5% Tolerance, 0805 Size, 0.1 W"
U100: "ARM Cortex-M3 32-bit MCU, 64 KB Flash, 20 KB Internal RAM, 37 I/Os, 48-pin LQFP, -40 to 85 degC, Tray"
U101: library part B0505S/D, "1W isolated dc dc converter"
U102: library part 24AA64/SN, "64Kbit, 400kHz, 1.7V, I2C Serial EEPROM, 8-Pin SOIC 150mil, Commercial Temperature"
U103: library part "PC817 optocoupler", "4-Pin Phototransistor Optocoupler"
U104: "Differential Bus Transceiver"
U105 U108: "High CMR, High Speed TTL Compatibile Optocoupler"
U106: "Positive Voltage Regulator"
U107: "800mA and 1A Low Dropout Positive Regulator 2.85V, 3.3V, 5V, and Adjustable"
U200 U201 U202: library part CD4051BCM, "8-Channel Analog Multiplexer/Demultiplexer"
U203: "Programmable Voltage Reference, 2.5 to 36V, 3-Pin SOT23-3, Tape and Reel"
Y100: library part HC49/4H_SMX, "Surface Mount Quartz Crystal"

## Free pads (board coordinates)
  round 0 hole 157.48: rupa(126.22,158.27) rupa(126.22,2770) rupa(3575,2770) rupa(3580,158.27)

## Via types
v1: diameter 31.5, hole 15.75, Top Layer to Bottom Layer, 148 vias

## Nets (pads, with @x,y where several pads share a name; then routed paths per layer and width w, separated by ;. In a path a pad name is that pad's centre, name@x,y a point inside that pad or via, vN(x,y) a via of type N, cw(c..) or ccw(c..) an arc to the next point about the centre after c; other vN are vias at no path point)
+3,3VREF: C230.2 C231.2 P201.1 P201.2 P201.3 P201.4 P201.5 P201.6 P201.7 P201.8 Q201.3 R237.2 R240.2 | length 1352.2
  Top Layer w30: Q201.3@574.88,1076.89 603.46,1048.31 R237.2@603.46,990 C231.2@603.46,930 R240.2@603.46,785 603.46,448.46 P201.7@595,440 P201.5@495,440 P201.3@395,440 P201.1@295,440 P201.2@295,540 P201.4@395,540 P201.6@495,540 P201.8@595,540
+3V3: C102.1 C103.1 C104.1 C105.1 C109.1 C116.2 C117.2 C118.2 C119.2 C125.2 C126.2 C127.2 L100.1 P100.2 P102.1 P103.2 P104.1 R100.2 R103.2 R106.1 R107.1 R108.2 U100.24 U100.36 U100.48 U102.1 U102.2 U102.3 U102.8 U103.1 U105.2 U107.2 U107.4 | length 11089.8
  Top Layer w10: R108.2@1275,1908.46 1336.54,1908.46 1385.55,1859.45 U100.48@1411.73,1859.45 ; U100.24@1628.27,1540.55 1669.45,1540.55 1708.46,1501.54 C118.2@1708.46,1460 ; U100.36@1679.45,1808.27 1749.65,1878.46 C119.2@1765,1878.46 v1(1765,1930)
  Top Layer w20: L100.1@1193.74,1265 1193.74,1201.26 v1(1195,1200) ; R108.2@1275,1908.46 1275,1970 C117.2@1276.54,1970 ; U102.8@1305,2355 1333.98,2383.98 R107.1@1333.98,2425 1380,2425 ; P104.1@1985,1555 2063.46,1555 R103.2@2080,1571.54 ; 2040,2225 2055,2210 U103.1@2055,2195 ; v1(2850,1500) 2810,1540 v1(2810,1555) 2835,1555 2860,1580 U105.2@2860,1610
  Top Layer w30: 805,1215 U107.2@805,1322.87 v1(805,1385) 805,1390 822.6,1407.6 C126.2@822.6,1585 ; C126.2@812.6,1585 812.6,2012.6 813.86,2012.6 854.26,2053 948,2053 952,2057 952,2120.74 1040,2208.74 1040,2240 1055,2255 U102.3@1116.02,2255 ; C117.2@1276.54,1970 1252.6,1993.94 C116.2@1252.6,2045 1252.6,2111.06 R106.1@1271.54,2130 1235,2130 1195,2170 1195,2235 1175,2255 U102.3@1116.02,2255 ; C118.2@1708.46,1460 1710,1458.46 v1(1710,1280) ; P100.2@1780,2040 1780,2185 1820,2225 v1(1935,2225) 2040,2225 ; v1(1780,2370) 1450,2370 1436.54,2383.46 C109.1@1395.51,2383.46 1395.51,2409.49 1380,2425 1365,2440 1365,2460 1348.98,2476.02 1191.02,2476.02 1116.02,2401.02 U102.1@1116.02,2355 U102.2@1116.02,2305 U102.3@1116.02,2255 ; C103.1@3287.4,1003.94 C102.1@3287.4,1050 ; C102.1@3307.4,1050 P102.1@3415,1050 ; R100.2@3321.54,2545 3321.54,2586.54 3345,2610 3580,2610 3650,2540 3650,1860 3586.06,1796.06 3488.46,1796.06 C105.1@3488.46,1730 3515,1703.46 P103.2@3515,1590
  Bottom Layer w30: v1(805,1385) 1010,1385 v1(1195,1200) ; v1(810,1645) 915,1540 1045,1540 1250,1335 1495,1335 1530,1370 1690,1370 1710,1350 v1(1710,1280) ; v1(1765,1930) 1780,1945 P100.2@1780,2040 v1(1780,2370) ; v1(1935,2225) 1935,2100 2000,2035 2045,2035 2125,1955 2125,1755 2200,1680 2200,1590 ; P104.1@1985,1555 2030,1555 2065,1590 2200,1590 ; v1(2810,1555) 2615,1555 2580,1590 2200,1590
  Bottom Layer w50: v1(2850,1500) 3035,1500 3210,1675 3510,1675 3515,1670 P103.2@3515,1590 3560,1590 3595,1555 3595,1200 3575,1180 3455,1180 3415,1140 P102.1@3415,1050
  other v1: 710,1005 758.75,1005 807.5,1005 856.25,1005 905,1005 710,1075 758.75,1075 807.5,1075 856.25,1075 905,1075 710,1150 758.75,1150 807.5,1150 856.25,1150 905,1150
+5V: C110.2 C111.2 C112.2 C123.1 C124.2 C128.2 C129.2 C130.2 C131.2 C135.2 C204.2 C206.2 C225.2 C227.2 C236.2 D101.1 L200.1 L201.1 P107.1 P205.1 P205.2 P205.3 P205.4 P205.5 P205.6 P205.7 P205.8 R117.1 U101.2 U106.2 U107.3 U108.7 U108.8 U200.16 U202.16 | length 12979.6
  Top Layer w20: C227.2@110,1418.46 197.2,1418.46 L201.1@198.74,1420 ; C225.2@2285,801.54 2352.05,801.54 U202.16@2360.51,810 v1(2430,810)
  Top Layer w30: L201.1@198.74,1420 198.74,1473.74 200,1475 365,1475 370,1470 370,1400 380,1390 v1@714.45,1390 ; U106.2@455,2115 455,2195 468.46,2208.46 C128.2@468.46,2275 ; C129.2@717.4,1665 C130.2@717.4,1585 C131.2@717.4,1505 717.4,1455 714.45,1452.05 v1@714.45,1390 ; C206.2@805,678.46 805,800 776.25,828.75 676.25,828.75 655,850 655,1310 667.87,1322.87 U107.3@714.45,1322.87 v1@714.45,1390 ; P107.1@1410,1060 1455,1015 1455,865 v1(1470,850) ; v1(1740,850) 1738.46,848.46 C204.2@1738.46,810 U200.16@1820.51,810 ; C111.2@1915,2392.4 2142.6,2392.4 2182.4,2352.6 ; C110.2@2182.4,2580 2182.4,2352.6 ; R117.1@2503.46,1530 U108.7@2503.46,1610.98 ; C123.1@2596.54,1530 2596.54,1609.45 U108.8@2595,1610.98 U108.7@2503.46,1610.98 ; C236.2@2685,241.54 2803.46,241.54 P205.1@2805,240 P205.3@2905,240 P205.5@3005,240 P205.7@3105,240 P205.8@3105,340 P205.6@3005,340 P205.4@2905,340 P205.2@2805,340 ; D101.1@3225,1994.29 3225,1890 3125,1790 2500,1790 ; 2182.4,2352.6 U101.2@2205,2330 2205,2295 2170,2260 2170,1855 2235,1790 2500,1790 ; 2500,1790 2500,1625 2494.72,1619.72 U108.7@2503.46,1610.98
  Top Layer w50: U106.2@455,2115 455,1865 510,1810 650,1810 717.4,1742.6 ; C129.2@717.4,1665 717.4,1742.6 ; C110.2@2182.4,2580 2182.4,2637.6 2135,2685 2005,2685 1855,2835 890,2835 855,2800 855,2395 717.4,2257.4 717.4,1742.6
  Bottom Layer w30: v1(715,1385) 753.75,1346.25 821.05,1346.25 821.8,1347 988,1347 1190,1145 1190,1090 1220,1060 P107.1@1410,1060 ; v1(2430,810) 2165,810 2125,850 v1(1740,850) v1(1470,850) 1430,810 1430,660 1465,625 1555,625 1600,580 1600,460 1630,430 2770,430 2805,395 P205.2@2805,340
+5V_COM: C113.2 C114.2 C115.2 C122.2 C134.1 R111.1 R116.2 U101.4 U103.4 U104.8 U105.7 U105.8 | length 2648.9
  Top Layer w10: U103.4@2291.22,2195 2405,2308.78 U101.4@2405,2330
  Top Layer w20: R116.2@2563.46,2060 v1(2625,2060) 2630,2060 2640,2070 2640,2095 2650,2105 2752,2105 2763.46,2093.54 C134.1@2763.46,2060 ; C134.1@2760,2056.54 U105.8@2760,1984.02 U105.7@2860,1984.02 2860,2043.46 R111.1@2876.54,2060 ; U104.8@2845,2377.52 2845,2430 C122.2@2880,2465
  Top Layer w30: C114.2@2402.4,2580 2405,2577.4 2405,2395 ; U101.4@2405,2330 2405,2395 ; C115.2@2535,2388.46 C115.2@2535,2392.4 ; C113.2@2605,2392.4 C115.2@2535,2392.4 ; C122.2@2886.54,2475 2835,2475 2730,2580 2730,2740 2690,2780 2575,2780 2535,2740 C115.2@2535,2392.4 ; 2405,2395 2407.6,2392.4 C115.2@2535,2392.4
  Bottom Layer w30: U101.4@2405,2330 2550,2330 2625,2255 v1(2625,2060)
+BAT: C132.2 C133.1 P106.2 R224.2 U106.1 | length 1173.3
  Top Layer w10: R224.2@110,2108.46 U106.1@248.46,2108.46
  Top Layer w50: C133.1@256.57,1745 255,1746.57 U106.1@255,2115 235,2135 235,2443.43 P106.2@466.57,2675
ANIN_0: P200.1 R206.2 | length 101.5
  Top Layer w30: P200.1@800,115 R206.2@800,216.54
ANIN_1: P200.2 R208.2 | length 101.5
  Top Layer w30: P200.2@900,115 R208.2@900,216.54
ANIN_2: P200.3 R210.2 | length 101.5
  Top Layer w30: P200.3@1000,115 R210.2@1000,216.54
ANIN_3: P200.4 R212.2 | length 101.5
  Top Layer w30: P200.4@1100,115 R212.2@1100,216.54
ANIN_4: P200.5 R214.2 | length 101.5
  Top Layer w30: P200.5@1200,115 R214.2@1200,216.54
ANIN_5: P200.6 R216.2 | length 101.5
  Top Layer w30: P200.6@1300,115 R216.2@1300,216.54
ANIN_6: P200.7 R218.2 | length 101.5
  Top Layer w30: P200.7@1400,115 R218.2@1400,216.54
ANIN_7: P200.8 R219.2 | length 101.5
  Top Layer w30: P200.8@1500,115 R219.2@1500,216.54
ANIN_MUX_0: D204.2 D205.1 U100.10 U201.3 | length 1163
  Top Layer w10: U201.3@1244.49,785 1376.26,785 D205.1@1385,776.26 D204.2@1385,853.74 1413.74,853.74 1420,860 1420,995 1405,1010 1365,1010 1355,1020 1355,1115 1325,1145 1325,1445 1313,1457 1313,1457.46 1293,1477.46 1293,1612.54 1311.56,1631.1 U100.10@1360.55,1631.1
CONFIG: P100.1 R101.2 U100.39 | length 327.5
  Top Layer w10: U100.39@1588.9,1859.45 1588.9,1913.9 1600,1925 1624.54,1925 1677.54,1978 1678,1978 1678.46,1978.46 1678.46,2041.54 P100.1@1680,2040 R101.2@1680,2131.54
DIN0: P204.1 R203.2 R204.1 | length 489
  Top Layer w10: R204.1@1730,516.54 1730,335 P204.1@1825,240
  Bottom Layer w10: R203.2@1730,138.46 1730,200 1770,240 P204.1@1825,240
DIN1: P204.2 R202.2 R205.1 | length 483.8
  Top Layer w10: R205.1@1790,516.54 1790,375 P204.2@1825,340
  Bottom Layer w10: R202.2@1789.67,138.46 1789.67,179.67 1805,195 1865,195 1875,205 1875,290 P204.2@1825,340
DIN2: P204.3 R201.2 R207.1 | length 440.5
  Top Layer w10: R207.1@1850,516.54 1850,415 1875,390 1875,290 P204.3@1925,240
  Bottom Layer w10: R201.2@1849.33,138.46 1849.33,151.05 1925,226.72 P204.3@1925,240
DIN3: P204.4 R200.2 R209.1 | length 432.3
  Top Layer w10: R209.1@1910,516.54 1910,425 1925,410 P204.4@1925,340
  Bottom Layer w10: R200.2@1909,138.46 1909,154 1975,220 1975,290 P204.4@1925,340
DIN4: P204.5 R211.1 R223.2 | length 424.2
  Top Layer w10: R211.1@1970,516.54 1970,295 P204.5@2025,240
  Bottom Layer w10: R223.2@1968.67,138.46 1968.67,165.38 2025,221.72 P204.5@2025,240
DIN5: P204.6 R213.1 R222.2 | length 408.6
  Top Layer w10: P204.6@2030,345 R213.1@2030,516.54
  Bottom Layer w10: P204.6@2025,340 2069.53,295.47 2069.53,214.53 2028.33,173.33 R222.2@2028.33,138.46
DIN6: P204.7 R215.1 R221.2 | length 420.3
  Top Layer w10: R215.1@2090,516.54 2090,455 2075,440 2075,290 P204.7@2125,240
  Bottom Layer w10: R221.2@2088,138.46 2088,183 2125,220 P204.7@2125,240
DIN7: P204.8 R217.1 R220.2 | length 420.6
  Top Layer w10: P204.8@2125,340 2125,415 2150,440 R217.1@2150,516.54
  Bottom Layer w10: P204.8@2125,340 2175,290 2175,205 2147.33,177.33 R220.2@2147.33,138.46
DIN8: P204.9 R230.2 R232.1 | length 417.4
  Top Layer w10: R232.1@2210,516.54 2210,455 2180,425 2180,285 P204.9@2225,240
  Bottom Layer w10: R230.2@2205,138.46 2205,175 2225,195 P204.9@2225,240
DIN9: P204.10 R228.2 R233.1 | length 421.6
  Top Layer w10: P204.10@2225,340 2225,410 2270,455 R233.1@2270,516.54
  Bottom Layer w10: P204.10@2225,340 2275,290 2275,195 2265,185 R228.2@2265,138.46
DIN10: P204.11 R227.2 R234.1 | length 421.6
  Top Layer w10: P204.11@2325,240 2275,290 2275,400 2330,455 R234.1@2330,516.54
  Bottom Layer w10: R227.2@2325,138.46 P204.11@2325,240
DIN11: P204.12 R226.2 R235.1 | length 430.4
  Top Layer w10: P204.12@2325,340 2325,405 2390,470 R235.1@2390,516.54
  Bottom Layer w10: P204.12@2325,340 2375,290 2375,200 2386.33,188.67 R226.2@2386.33,138.46
DIN12: P204.13 R236.1 R246.2 | length 438
  Top Layer w10: P204.13@2425,240 2375,290 2375,395 2448.75,468.75 R236.1@2448.75,516.54
  Bottom Layer w10: P204.13@2425,240 2425,230 2446,209 R246.2@2446,138.46
DIN13: P204.14 R238.1 R245.2 | length 445.7
  Top Layer w10: P204.14@2425,340 2425,400 2507.5,482.5 R238.1@2507.5,516.54
  Bottom Layer w10: P204.14@2425,340 2475,290 2475,210 2505.67,179.33 R245.2@2505.67,138.46
DIN14: P204.15 R239.1 R244.2 | length 453.3
  Top Layer w10: P204.15@2525,240 2475,290 2475,390 2566.25,481.25 R239.1@2566.25,516.54
  Bottom Layer w10: P204.15@2525,240 2565.33,199.67 R244.2@2565.33,138.46
DIN15: P204.16 R241.1 R243.2 | length 460.9
  Top Layer w10: P204.16@2525,340 2525,385 2625,485 R241.1@2625,516.54
  Bottom Layer w10: P204.16@2525,340 2625,240 R243.2@2625,138.46
DIN_MUX_0: U100.19 U200.3 | length 1399.9
  Top Layer w10: U100.19@1529.84,1540.55 1529.84,1484.84 1510,1465 1510,1305 1605,1210 1665,1210 1705,1170 1705,1000 1600,895 v1(1580,895)
  Top Layer w20: U200.3@2009.49,910 v1(2075,910)
  Bottom Layer w10: v1(1580,895) 1830,895 1845,910 v1(2075,910)
DIN_MUX_1: U100.20 U202.3 | length 1784.4
  Top Layer w10: U100.20@1549.53,1540.55 1549.53,1469.53 1530,1450 1530,1310.46 1612.46,1228 1672.46,1228 1725,1175.46 1725,1030 v1(1745,1010)
  Top Layer w20: v1(2480,910) U202.3@2549.49,910
  Bottom Layer w10: v1(1745,1010) 1810,1010 1825,1025 1825,1125.94 1889.06,1190 1915,1190 1945,1160 1945,1045 2030,960 2090,960 2140,910 v1(2480,910)
EXP_CSN: P107.2 U100.12 | length 494.8
  Top Layer w10: U100.12@1343.27,1591.73 U100.12@1360.55,1591.73 1330,1561.18 1330,1500 1410,1420 P107.2@1410,1160
GND_COM: C113.1 C114.1 C115.1 C122.1 C134.2 D102.3 P105.1 R110.2 U101.3 U104.5 U105.5 | length 2122.3
  Top Layer w20: D102.3@2725,2222.68 D102.3@2737.68,2222.68 ; C122.1@2953.46,2470 2995,2428.46 U104.5@2995,2377.52 ; C122.1@2953.46,2475 v1(3015,2475)
  Top Layer w30: C114.1@2327.6,2580 2327.6,2352.6 U101.3@2305,2330 2305,2275 2275,2245 2240,2245 2225,2230 2225,2150 2230,2145 2325,2145 2343.46,2163.46 R110.2@2375,2163.46 2375,2205 2487.6,2317.6 C113.1@2605,2317.6 2605,2250 2632.32,2222.68 D102.3@2725,2222.68 ; C134.2@2695,2060 2692.5,2057.5 2692.5,1947.5 2730,1910 3040,1910 3060,1930 U105.5@3060,1984.02 ; P105.1@3028.54,2675 P105.1@3030,2676.46
  Bottom Layer w50: v1(3015,2475) 3030,2490 P105.1@3030,2676.46
HC12_SET: P101.5 U100.18 | length 2397.6
  Top Layer w10: v1(1510,1610) 1510.16,1609.84 U100.18@1510.16,1540.55
  Bottom Layer w10: v1(1510,1610) 1540,1610 1581.75,1568.25 1628.25,1568.25 1665,1605 1860.91,1605 1906,1559.91 1906,1530 1931,1505 2055,1505 2110,1560 2566.22,1560 2606.22,1520 2815.66,1520 2845,1549.34 2845,1580 2860,1595 3045,1595 3415,1965 P101.5@3505,1965
I2C1_SCL: R107.2 U100.42 U102.6 | length 832.2
  Top Layer w10: R107.2@1267.05,2425 1235,2425 1230,2420 1230,2280 1255,2255 U102.6@1305,2255 1355,2255 1367.51,2242.49 1367.51,2172.49 1390,2150 1475,2150 1529.84,2095.16 U100.42@1529.84,1859.45
I2C1_SDA: R106.2 U100.43 U102.5 | length 507.3
  Top Layer w10: U102.5@1305,2205 1338.46,2171.54 R106.2@1338.46,2130 1469.54,2130 1510.16,2089.39 U100.43@1510.16,1859.45
LED_0: R247.2 U100.32 | length 1523
  Top Layer w10: v1(1550,1760) 1550,1720 1570,1700 1600,1700 1629.53,1729.53 U100.32@1679.45,1729.53
  Bottom Layer w10: R247.2@960,2586.54 960,2550 1028,2482 1482.54,2482 1495,2469.54 1495,1815 1540,1770 v1@1540,1760